# EAGLE board OLM-base_v0.9 (EAGLE 6.4)
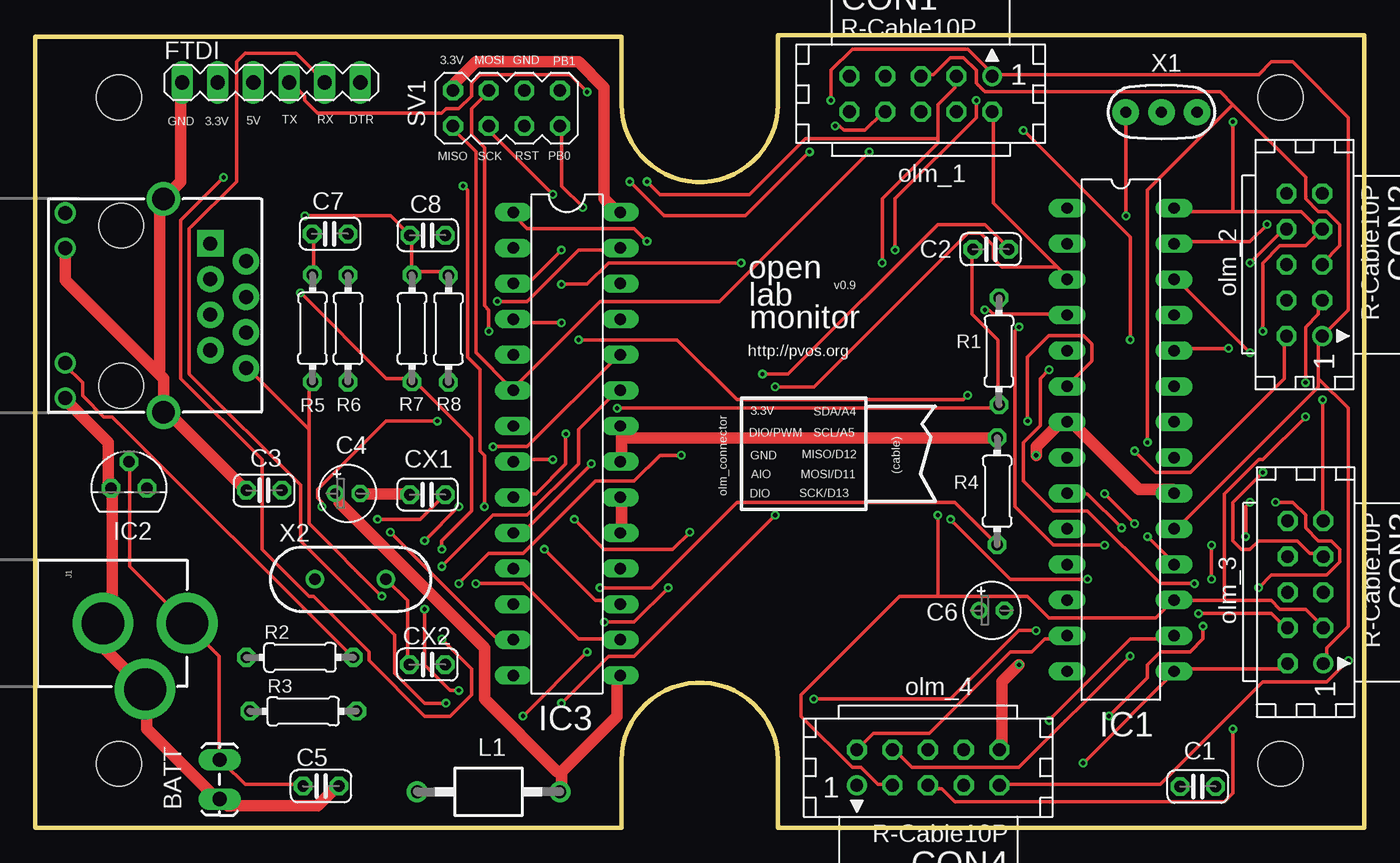
[diagram p0: board, top side]
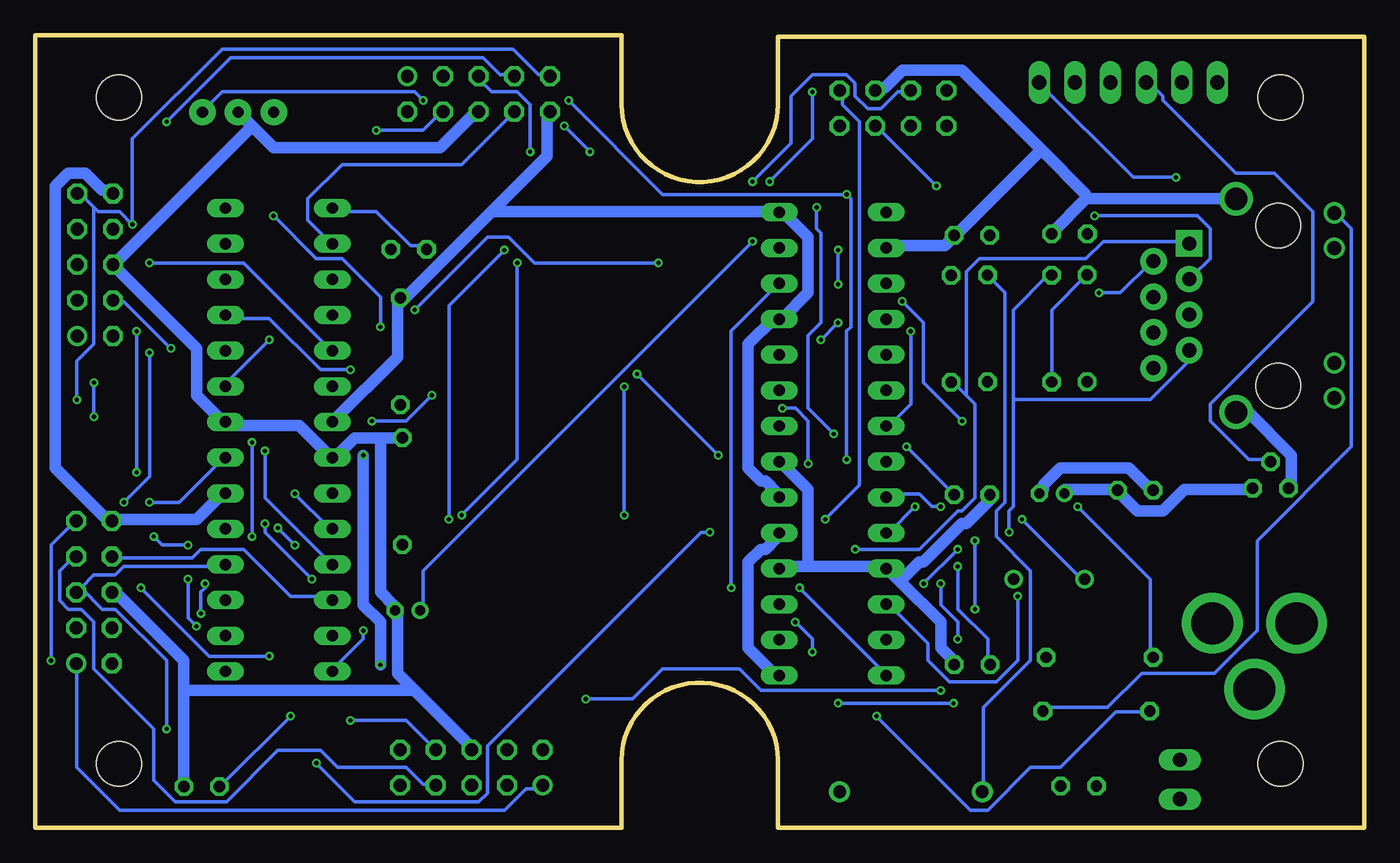
[diagram p1: board, bottom side, seen from below]

Size 94.74 x 56.52 mm. Coordinates in mm from the lower left corner, seen from the top.
Outline: 94.62,0 52.96,0 52.96,4.85
Outline: 41.78,4.9 41.78,0 0,0 0,56.39 41.78,56.39 41.78,51.51
Outline: 41.78,4.83 arc-179 52.96,4.83
Outline: 41.78,51.56 arc179 52.96,51.56 52.96,56.52 94.74,56.52 94.74,0
Copper layers (1*16): Top 0.035mm / dielectric 1.5mm / Bottom 0.035mm
Design rules "EagleRules": minimum track width 7mil, minimum drill 12mil, track to track 7mil, track to pad 7mil, pad to pad 7mil, via to via 7mil, smd to smd 0mil, copper to edge 20mil, drill to drill 10mil, minimum pad ring 10mil, minimum via ring 6mil, stop-mask expansion 2mil, vias tented up to drill 25mil, thermal gap 10mil
Net classes: 0 default: width 0.254 mm, drill 0.254 mm, clearance 0.254 mm; 1 power: width 0.813 mm, drill 0.254 mm, clearance 0.254 mm; 2 gnd: width 0.305 mm, drill 0.559 mm, clearance 0.254 mm
Holes 3.2 mm at 5.97,52.07 88.77,52.07 88.77,4.57 5.97,4.57

## Footprints (pad centres in the part's own frame; a part is rotated, then mirrored left to right if it is on the bottom)
C025-024X044 = drill 0.813 octagon: 1 -1.27,0; 2 1.27,0
E1,8-4 = drill 0.711 pad 1.168: + -0.889,0 | drill 0.711 pad 1.168 octagon: - 0.889,0
CON10L = drill 0.914: 1 5.08,1.27 | drill 0.914 octagon: 2 5.08,-1.27; 3 2.54,1.27; 4 2.54,-1.27; 5 0,1.27; 6 0,-1.27; 7 -2.54,1.27; 8 -2.54,-1.27; 9 -5.08,1.27; 10 -5.08,-1.27
MA06-1 = drill 1.016 long: 1 0,0; 2 2.54,0; 3 5.08,0; 4 7.62,0; 5 10.16,0; 6 12.7,0
DIL28-3 = drill 0.813 long: 1 -16.51,-3.81; 2 -13.97,-3.81; 3 -11.43,-3.81; 4 -8.89,-3.81; 5 -6.35,-3.81; 6 -3.81,-3.81; 7 -1.27,-3.81; 8 1.27,-3.81; 9 3.81,-3.81; 10 6.35,-3.81; 11 8.89,-3.81; 12 11.43,-3.81; 13 13.97,-3.81; 14 16.51,-3.81; 15 16.51,3.81; 16 13.97,3.81; 17 11.43,3.81; 18 8.89,3.81; 19 6.35,3.81; 20 3.81,3.81; 21 1.27,3.81; 22 -1.27,3.81; 23 -3.81,3.81; 24 -6.35,3.81; 25 -8.89,3.81; 26 -11.43,3.81; 27 -13.97,3.81; 28 -16.51,3.81
TO92 = drill 0.813 octagon: 1 -1.27,0; 2 0,1.905; 3 1.27,0
POWER_JACK_PTH = drill 2.997 pad 4.318: GND 0,7.7; GNDBREAK 4.7,10.7; PWR 0,13.7
MAGJACK = drill 1 pad 1.88 square: 1 3.175,17.445 | drill 1 pad 1.88: 2 4.445,19.985; 3 5.715,17.445; 4 6.985,19.985; 5 8.255,17.445; 6 9.525,19.985; 7 10.795,17.445; 8 12.065,19.985 | drill 1 pad 1.27: 9 1,7.1; 10 3.5,7.1; 11 11.7,7.1; 12 14.2,7.1 | drill 1.6 pad 2.184: M1 0,14.1; M2 15.2,14.1 | hole 3.2: 1.905,11.095; 13.335,11.095
1X02_LOCK_LONGPADS = drill 1.016 long: 1 -0.127,0; 2 2.667,0
BL01RN1A = drill 0.9 pad 1.5: 1 -5.08,0; 2 5.08,0
0204/7 = drill 0.813 octagon: 1 -3.81,0; 2 3.81,0
MA04-2 = drill 0.9 octagon: 1 -3.81,-1.27; 2 -3.81,1.27; 3 -1.27,-1.27; 4 -1.27,1.27; 5 1.27,-1.27; 6 1.27,1.27; 7 3.81,-1.27; 8 3.81,1.27
RESONATOR-PTH = drill 0.8 pad 1.88: 1 -2.54,0; 2 0,0; 3 2.54,0
HC49US = drill 0.813: 1 -2.54,0; 2 2.54,0

## Placement (x,y rotation side)
C1  0.1µ  [C025-024X044]  82.86,2.95 0 top
C2  0.1µ  [C025-024X044]  68.11,41.25 0 top
C3  0.1µ  [C025-024X044]  16.32,24.06 180 top
C4  10µ  [E1,8-4]  22.28,23.85 0 top
C5  0.1µ  [C025-024X044]  20.37,2.98 0 top
C6  10u  [E1,8-4]  68.19,15.5 0 top
C7  0.1µ  [C025-024X044]  21.02,42.35 180 top
C8  0.1µ  [C025-024X044]  27.98,42.24 180 top
CON1  [CON10L]  63.13,52.32 0 top
CON2  [CON10L]  90.46,40.15 270 top
CON3  [CON10L]  90.54,16.79 270 top
CON4  [CON10L]  63.64,4.3 180 top
CX1  18p  [C025-024X044]  27.97,23.75 180 top
CX2  18p  [C025-024X044]  27.96,11.64 0 top
FTDI  FTDI  [MA06-1]  10.48,53.13 0 top
IC1  ATMEGA  [DIL28-3]  77.38,27.67 270 top
IC2  MCP1702-33  [TO92]  6.69,24.2 0 top
IC3  ENC28J60SP  [DIL28-3]  37.9,27.38 270 top
J1  POWER_JACKPTH  [POWER_JACK_PTH]  -2.86,14.59 270 top
J2  MAGJACK  [MAGJACK]  -4.96,44.84 270 top
JP1  BATT  [1X02_LOCK_LONGPADS]  13.15,4.72 270 top
L1  BL01RN1A  [BL01RN1A]  32.32,2.57 0 top
R1  10k  [0204/7]  68.7,33.98 90 top
R2  1K  [0204/7]  18.88,12.15 0 top
R3  1K  [0204/7]  19.11,8.31 0 top
R4  2.32K  [0204/7]  68.57,24 90 top
R5  49.9  [0204/7]  19.78,35.61 90 top
R6  49.9  [0204/7]  22.3,35.59 90 top
R7  49.9  [0204/7]  26.87,35.6 90 top
R8  49.9  [0204/7]  29.47,35.58 270 top
SV1  SPI/ISP  [MA04-2]  33.6,51.3 0 top
X1  16 MHz  [RESONATOR-PTH]  80.27,51.02 0 top
X2  25MHz  [HC49US]  22.47,17.72 0 top

## Library data of the parts
C1-C8 CX1 CX2 R1 = resistor
CON1-CON4 = con-harting; OC_FARNELL: unknown; OC_NEWARK: unknown
FTDI IC2 SV1 = JeeLabs
IC1 = atmega8
IC3 = microchip; MF: MICROCHIP; MPN: ENC28J60/SP; OC_FARNELL: 1084619; OC_NEWARK: 96K3661
J1 = SparkFun-Connectors
J2 JP1 X1 X2 = SparkFun
L1 = inductors
R2-R8 = rcl

## Nets
A0: CON1.4 IC1.23
A1: CON2.4 IC1.24
A2: CON3.4 IC1.25
A3: CON4.4 IC1.26
D0/RX: CON1.8 FTDI.4 IC1.2
D1/TX: CON1.2 FTDI.5 IC1.3
D2: IC1.4 IC3.3
D3/PWM: CON2.8 IC1.5
D4: IC1.6 IC3.4
D5/PWM: CON2.2 IC1.11
D6/PWM: CON3.8 IC1.12
D7: CON4.2 IC1.13
D10/PWM: CON4.8 IC1.16
GND [power]: C1.2 C3.2 C4.- C5.2 C6.- C7.1 C8.1 CON1.6 CON2.6 CON3.6 CON4.6 CX1.2 CX2.2 FTDI.1 IC1.8 IC1.22 IC2.1 IC3.2 IC3.11 IC3.18 IC3.21 IC3.22 J1.GND J1.GNDBREAK J2.10 J2.12 J2.M1 J2.M2 JP1.2 R4.2 SV1.6 X1.2
LEDA: J2.11 R2.2
LEDB: J2.9 R3.2
MISO/D12: CON1.5 CON2.5 CON3.5 CON4.5 IC1.18 IC3.6 SV1.1
MOSI/D11: CON1.3 CON2.3 CON3.3 CON4.3 IC1.17 IC3.7 SV1.4
N$1: IC1.9 X1.1
N$19: C1.1 IC1.21
N$20: C2.2 FTDI.6
N$21: IC1.10 X1.3
N$37: IC3.27 R2.1
N$39: IC3.26 R3.1
N$50: C6.+ IC3.1
N$51: IC3.14 R4.1
N$52: CX1.1 IC3.24 X2.1
N$53: CX2.1 IC3.23 X2.2
N$54: C7.2 R5.2 R6.1
PB0/D8: IC1.14 IC3.9 SV1.7
PB1/D9/PWM: CON3.2 IC1.15 SV1.8
RD+: IC3.13 J2.7 R6.2
RD-: IC3.12 J2.8 R5.1
RESET: C2.1 IC1.1 IC3.10 R1.1 SV1.5
SCK/D13: CON1.1 CON2.1 CON3.1 CON4.1 IC1.19 IC3.8 SV1.3
SCL/A5: CON1.7 CON2.7 CON3.7 CON4.7 IC1.28
SDA/A4: CON1.9 CON2.9 CON3.9 CON4.9 IC1.27
TCT: C8.2 J2.3 L1.1 R7.2 R8.1
TD+: IC3.17 J2.1 R8.2
TD-: IC3.16 J2.2 R7.1
VCC [power]: C3.1 C4.+ CON1.10 CON2.10 CON3.10 CON4.10 IC1.7 IC1.20 IC2.3 IC3.15 IC3.19 IC3.20 IC3.25 IC3.28 L1.2 R1.2 SV1.2
VIN: C5.1 FTDI.3 IC2.2 J1.PWR JP1.1

## Tracks (layer width: path | path; a pad name or v marks a point on that pad's centre or on a via)
A0  (via drill 0.3)
  Top 0.254: v78.05,34.79 78.05,42.11 v70.43,49.73
  Bottom 0.254: v78.05,34.79 81.1,31.74 IC1.23 | v70.43,49.73 67.08,49.73 65.86,50.95 CON1.4
A1  (via drill 0.3)
  Top 0.254: v85.06,34.18 81.41,34.18 IC1.24
  Bottom 0.254: v85.06,34.18 88.42,37.53 89.03,37.53 CON2.4
A2  (via drill 0.3)
  Top 0.254: v72.26,32.66 71.65,32.05 71.65,28.69 70.43,27.48 70.43,24.73 72.57,22.6 75.01,22.6 80.19,17.42 v82.63,17.42 | v82.93,15.28 88.11,15.28 89.03,14.37 CON3.4
  Bottom 0.254: v72.26,32.66 74.4,32.66 78.05,36.31 81.1,36.31 IC1.25 | v82.63,17.42 82.63,17.11 82.93,16.81 v82.93,15.28
A3  (via drill 0.3)
  Top 0.254: v86.59,33.88 81.41,39.06 IC1.26 | v88.42,23.21 89.64,23.21 90.55,22.29 90.55,21.38 91.47,20.47 92.38,20.47 92.99,19.86 92.99,18.94 92.08,18.03 88.11,18.03 v87.2,17.11 | v78.05,12.24 70.13,4.31 62.51,4.31 61.29,5.53 CON4.4
  Bottom 0.254: v86.59,33.88 86.59,25.04 v88.42,23.21 | v87.2,17.11 82.32,12.24 v78.05,12.24
D0/RX  (via drill 0.3)
  Top 0.254: v39.34,52.47 38.13,53.69 31.72,53.69 31.12,53.08 31.12,52.16 30.2,51.25 29.29,51.25 28.98,50.95 20.14,50.95 19.23,51.86 19.23,52.16 18.31,53.08 FTDI.4 | v42.39,46.07 44.83,43.63 50.62,43.63 v55.19,48.2 | v57.02,50.03 57.33,50.03 57.63,49.73 59.16,49.73 60.38,50.95 CON1.8
  Bottom 0.254: IC1.2 73.79,41.8 75.31,43.33 75.31,44.85 72.87,47.29 64.34,47.29 60.68,50.95 CON1.8 | v39.34,52.47 39.34,49.12 v42.39,46.07 | v57.02,50.03 v55.19,48.2
D1/TX  (via drill 0.3)
  Top 0.254: 72.87,39.97 68.3,44.54 68.3,50.95 CON1.2 | 72.87,39.97 73.48,39.36 IC1.3 | v29.29,8.88 27.76,8.88 25.63,11.02 25.63,13.76 18.92,20.47 18.92,24.43 11,32.35 11,42.72 14.35,46.07 14.35,54.6 14.96,55.21 18.62,55.21 20.45,53.38 FTDI.5 | v37.52,8.88 40.87,12.24 42.7,12.24 v52.76,22.29 | v52.76,31.44 55.5,31.44 66.47,42.41 67.39,42.41 68.3,41.5 68.3,40.58 68.91,39.97 72.87,39.97
  Bottom 0.254: v37.52,8.88 v29.29,8.88 | v52.76,31.44 v52.76,22.29
D2  (via drill 0.3)
  Top 0.254: v37.52,41.19 35.38,39.06 34.16,39.06 IC3.3 | v37.52,38.75 39.34,38.75 40.87,40.28 v50.32,40.28 | v67.69,36.92 68,36.92 68.3,36.62 73.48,36.62 IC1.4
  Bottom 0.254: v37.52,38.75 v37.52,41.19 | v50.32,40.28 59.16,40.28 60.99,42.11 62.51,42.11 v67.69,36.92
D3/PWM  (via drill 0.3)
  Top 0.254: v86.59,40.28 89.03,42.72 CON2.8
  Bottom 0.254: v86.59,40.28 79.88,40.28 73.79,34.18 IC1.5
D4  (via drill 0.3)
  Top 0.254: v37.52,36.01 34.16,36.01 IC3.4 | v38.74,34.79 45.75,34.79 50.01,30.52 66.17,30.52 v66.47,30.83 | v70.74,29 70.74,33.57 72.26,35.1 74.7,35.1 75.31,34.49 75.31,33.27 73.79,31.74 IC1.6
  Bottom 0.254: v38.74,34.79 v37.52,36.01 | v66.47,30.83 68.3,29 v70.74,29
D5/PWM  (via drill 0.3)
  Top 0.254: v78.36,26.87 79.88,25.34 82.32,25.34 89.03,32.05 89.03,34.79 CON2.2
  Bottom 0.254: v78.36,26.87 78.36,23.51 73.79,18.94 IC1.11
D6/PWM
  Bottom 0.254: IC1.12 73.79,16.5 76.53,16.5 79.88,19.86 82.93,19.86 83.54,19.25 89.03,19.25 CON3.8
D7
  Top 0.254: IC1.13 73.48,13.45 71.96,13.45 71.04,12.54 69.52,12.54 63.73,6.75 59.77,6.75 58.85,5.83 CON4.2
D10/PWM  (via drill 0.3)
  Top 0.254: v72.26,7.66 78.05,13.45 81.1,13.45 IC1.16
  Bottom 0.254: v72.26,7.66 68.3,7.66 66.47,5.83 CON4.8
GND
  Top 0.813: J2.12 2.16,30.52 5.21,27.48 5.21,24.43 IC2.1 5.51,23.82 5.51,15.28 4.9,14.67 J1.GND 4.9,14.37 4.9,12.85 7.65,10.1 J1.GNDBREAK 7.95,9.8 7.95,7.05 12.83,2.18 JP1.2 13.44,1.87 13.74,1.57 20.14,1.57 21.36,2.79 C5.2 | FTDI.1 10.39,53.08 10.39,46.07 9.17,44.85 J2.M1 8.86,44.54 8.86,32.66 8.71,32.5 | 41.78,27.78 41.78,28.39 IC3.22 | 41.78,27.78 41.78,26.26 IC3.21 | C4.- 23.19,23.82 26.54,23.82 CX1.2 | C3.2 14.96,24.12 9.17,29.91 J2.M2 9.17,30.22 9.17,32.05 8.71,32.5 | 8.71,32.5 2.16,39.06 2.16,41.19 J2.10 | 41.78,27.78 68.3,27.78 R4.2
  Bottom 0.813: 79.27,50.03 80.19,50.95 X1.2 | 79.27,50.03 77.75,48.51 65.86,48.51 63.42,50.95 CON1.6 | 79.27,50.03 89.03,40.28 CON2.6 89.03,39.97 83.24,34.18 83.24,30.83 81.41,29 IC1.22 81.1,28.69 75.92,28.69 73.79,26.56 IC1.8 73.48,26.26 71.96,27.78 70.13,27.78 | 84.15,9.8 84.15,11.93 89.03,16.81 CON3.6 | 84.15,9.8 84.15,3.09 C1.2 | 70.13,27.78 68.61,27.78 R4.2 | 67.84,9.95 63.73,5.83 CON4.6 | 67.84,9.95 68.91,11.02 68.91,15.28 C6.- 69.22,15.89 70.13,16.81 70.13,27.78 | 84.15,9.8 68,9.8 67.84,9.95 | IC3.2 33.86,41.5 29.9,41.5 29.29,42.11 C8.1 28.98,42.41 23.04,48.35 | 19.84,44.85 22.28,42.41 C7.1 | 19.84,44.85 9.17,44.85 J2.M1 | 23.04,48.35 19.84,45.15 19.84,44.85 | 23.04,48.35 28.68,53.99 32.94,53.99 34.16,52.77 34.77,52.77 SV1.6 | 33.1,17.57 33.86,18.33 IC3.11 34.47,18.64 39.65,18.64 | 33.1,17.57 30.2,14.67 30.2,12.85 29.29,11.93 CX2.2 | 39.65,18.64 41.48,18.64 IC3.18 | 39.65,18.64 39.65,24.12 41.48,25.95 IC3.21 | C4.- 22.89,24.12 22.89,24.43 21.67,25.65 16.79,25.65 15.27,24.12 C3.2 | 33.1,17.57 31.72,18.94 31.42,18.94 28.68,21.68 28.37,21.68 26.54,23.51 CX1.2 | IC2.1 5.21,24.43 5.21,26.56 8.26,29.61 8.86,29.61 J2.M2
LEDA
  Top 0.254: R2.2 22.58,12.24 5.51,29.3 4.9,29.3 3.38,30.83 3.38,31.74 2.16,32.96 J2.11
LEDB
  Bottom 0.254: R3.2 22.89,8.58 18.31,8.58 15.88,11.02 10.69,11.02 7.65,14.06 7.65,20.47 0.94,27.17 0.94,42.72 1.85,43.63 J2.9
MISO/D12  (via drill 0.3)
  Top 0.254: v85.37,7.05 85.37,2.48 84.76,1.87 65.56,1.87 64.64,2.79 63.73,2.79 CON4.5 | SV1.1 29.59,50.03 31.42,48.2 31.42,33.88 33.86,31.44 IC3.6 34.16,31.44 40.26,37.53 48.79,37.53 v59.46,48.2 | 85.37,51.55 90.55,46.37 90.55,44.85 91.47,43.93 92.08,43.93 92.99,43.02 92.99,41.5 91.77,40.28 CON2.5 | 85.37,51.55 84.46,52.47 67.69,52.47 67.08,53.08 67.08,53.99 66.17,54.91 65.25,54.91 64.03,53.69 63.42,53.69 CON1.5 | v79.27,20.77 81.1,18.94 IC1.18 | v79.27,27.48 79.27,45.46 85.37,51.55
  Bottom 0.254: 91.47,17.11 91.77,16.81 CON3.5 91.47,17.11 | 91.47,17.11 90.55,18.03 89.03,18.03 88.42,18.64 81.41,18.64 IC1.18 | v85.37,7.05 85.37,11.93 89.03,15.59 89.94,15.59 91.47,17.11 | v59.46,48.2 59.46,51.55 60.38,52.47 62.2,52.47 63.12,53.38 CON1.5 | v79.27,27.48 v79.27,20.77
MOSI/D11  (via drill 0.3)
  Top 0.254: v32.33,35.4 32.33,36.92 32.03,37.23 32.03,48.51 31.12,49.42 31.12,51.25 32.33,52.47 SV1.4 | 84.76,16.2 88.11,16.2 88.72,15.59 90.55,15.59 91.77,14.37 CON3.3 | 84.76,16.2 81.41,16.2 IC1.17 81.1,16.2 79.88,14.98 72.26,14.98 70.74,16.5 64.34,16.5 | 64.34,16.5 61.6,16.5 54.58,9.49 54.58,7.97 58.24,4.31 58.85,4.31 60.07,3.09 60.99,3.09 CON4.3 | v90.55,31.74 90.55,35.71 91.47,36.62 91.47,37.53 CON2.3 | v90.55,29.3 87.5,26.26 87.2,26.26 84.76,23.82 84.76,16.2 | 64.34,49.12 64.34,48.81 60.38,44.85 v60.38,40.28 | 64.34,49.12 64.34,51.55 65.56,52.77 65.56,53.38 CON1.3 | 64.34,16.5 v64.34,22.29 | v43.61,46.07 44.53,45.15 50.93,45.15 54.89,49.12 64.34,49.12
  Bottom 0.254: v32.33,35.4 32.33,30.22 33.86,28.69 IC3.7 | v90.55,29.3 v90.55,31.74 | v60.38,40.28 60.38,26.26 v64.34,22.29 | v43.61,46.07 40.87,48.81 40.87,52.16 39.34,53.69 36.91,53.69 36.3,53.08 36.3,52.16 35.38,51.25 34.47,51.25 33.25,52.47 32.33,52.47 SV1.4
N$1  (via drill 0.3)
  Top 0.254: v77.44,21.38 75.01,23.82 73.79,23.82 IC1.9 | v76.23,20.16 72.57,20.16 69.82,22.9 69.82,35.4 v70.13,35.71 | v77.75,43.63 77.75,50.95 X1.1
  Bottom 0.254: v76.23,20.16 v77.44,21.38 | v70.13,35.71 70.13,37.84 72.87,40.58 74.7,40.58 v77.75,43.63
N$19  (via drill 0.3)
  Top 0.254: v76.53,7.97 79.27,10.71 79.27,11.63 80.19,12.54 82.32,12.54 83.24,13.45 v83.24,14.37 | v83.85,20.16 v83.85,17.72 | v86.28,20.77 86.28,22.9 v86.59,23.21
  Bottom 0.254: v76.53,7.97 81.41,3.09 C1.1 | v83.24,14.37 83.85,14.98 v83.85,17.72 | v83.85,20.16 85.67,20.16 v86.28,20.77 | v86.59,23.21 84.46,23.21 81.41,26.26 IC1.21
N$20  (via drill 0.3)
  Top 0.254: v51.84,32.35 53.67,32.35 64.34,43.02 67.69,43.02 69.22,41.5 C2.2 | v46.05,26.56 44.53,26.56 42.7,24.73 39.95,24.73 34.77,19.55 32.33,19.55 v30.2,17.42 | v28.98,13.45 31.12,11.32 31.12,9.49 29.59,7.97 27.76,7.97 23.8,11.93 23.8,12.54 19.84,16.5 19.53,16.5 16.18,19.86 16.18,26.26 10.39,32.05 10.39,43.33 v13.44,46.37
  Bottom 0.254: v46.05,26.56 v51.84,32.35 | v30.2,17.42 30.2,15.89 28.98,14.67 v28.98,13.45 | v13.44,46.37 16.48,46.37 23.19,53.08 FTDI.6
N$21  (via drill 0.3)
  Top 0.254: v78.36,21.68 v76.23,23.82 | v75.01,17.72 69.52,17.72 v65.25,21.99 | v61.29,41.19 61.29,44.85 67.08,50.64 v67.08,51.86
  Bottom 0.254: v76.23,23.82 73.79,21.38 IC1.10 | v78.36,21.68 78.36,21.07 v75.01,17.72 | v65.25,21.99 65.25,37.23 v61.29,41.19 | v67.08,51.86 67.69,52.47 81.41,52.47 82.63,51.25 X1.3
N$37  (via drill 0.3)
  Top 0.254: v20.45,22.9 20.45,23.21 20.14,23.51 20.14,24.12 25.02,29 v28.68,29 | v32.94,37.53 35.08,37.53 38.74,41.19 41.48,41.19 IC3.27
  Bottom 0.254: v20.45,22.9 15.27,17.72 15.27,12.24 R2.1 | v28.68,29 31.42,31.74 31.42,36.01 v32.94,37.53
N$39  (via drill 0.3)
  Top 0.254: v39.34,12.54 v34.77,7.97 | v40.56,14.67 42.7,14.67 v45.14,17.11
  Bottom 0.254: v34.77,7.97 28.07,1.26 26.85,1.26 23.8,4.31 21.67,4.31 17.7,8.27 15.57,8.27 R3.1 | v39.34,12.54 39.34,13.45 v40.56,14.67 | v45.14,17.11 45.14,35.4 41.78,38.75 IC3.26
N$50  (via drill 0.3)
  Top 0.254: v43.61,41.8 42.7,42.72 35.08,42.72 34.16,43.63 IC3.1
  Bottom 0.254: v43.61,41.8 67.08,18.33 67.08,15.59 C6.+
N$51  (via drill 0.3)
  Top 0.254: v40.26,17.11 43.92,17.11 50.01,23.21 65.56,23.21 68.3,20.47 R4.1
  Bottom 0.254: v40.26,17.11 34.16,11.02 IC3.14
N$52  (via drill 0.3)
  Top 0.254: v24.41,21.99 27.46,21.99 28.98,23.51 CX1.1 | v32.64,27.17 35.08,27.17 41.48,33.57 IC3.24
  Bottom 0.254: v24.41,21.99 20.14,17.72 X2.1 | v32.64,27.17 29.29,23.82 CX1.1
N$53  (via drill 0.3)
  Top 0.254: CX2.1 26.54,11.93 26.54,16.2 X2.2 | v28.98,18.64 32.64,22.29 35.08,22.29 38.74,25.95 38.74,28.39 41.48,31.13 IC3.23
  Bottom 0.254: v28.98,18.64 28.98,15.59 26.85,13.45 26.85,11.93 CX2.1
N$54
  Top 0.254: C7.2 19.84,42.11 19.84,39.67 R5.2
  Bottom 0.254: R6.1 22.28,32.05 22.28,36.92 19.84,39.36 R5.2
PB0/D8  (via drill 0.3)
  Top 0.254: v71.35,14.06 70.13,14.06 65.25,9.19 v55.5,9.19 | v30.2,9.8 29.59,9.8 27.76,11.63 v27.76,15.59 | v30.2,22.9 v27.76,20.47 | v39.04,44.24 37.52,45.76 37.52,50.03 SV1.7 | v37.82,28.09 37.82,25.95 35.69,23.82 34.16,23.82 IC3.9
  Bottom 0.254: v71.35,14.06 71.35,13.45 73.48,11.32 IC1.14 | v55.5,9.19 52.15,9.19 50.01,11.32 44.53,11.32 43,9.8 v30.2,9.8 | v27.76,20.47 v27.76,15.59 | v30.2,22.9 30.81,22.9 31.72,23.82 33.86,23.82 IC3.9 | v39.04,44.24 39.04,42.72 38.74,42.41 38.74,36.01 39.65,35.1 39.65,29.91 v37.82,28.09
PB1/D9/PWM  (via drill 0.3)
  Top 0.254: CON3.2 89.03,11.63 88.72,11.32 81.41,11.32 IC1.15 81.1,11.02 v74.7,4.62 | v38.43,21.99 40.56,19.86 45.44,19.86 v46.66,21.07
  Bottom 0.254: v38.43,21.99 35.99,24.43 35.99,50.34 37.21,51.55 37.21,52.47 SV1.8 | v46.66,21.07 47.27,21.07 62.51,5.83 62.51,2.48 63.12,1.87 71.96,1.87 v74.7,4.62
RD+  (via drill 0.3)
  Top 0.254: v25.32,21.07 32.94,13.45 33.86,13.45 IC3.13
  Bottom 0.254: v25.32,21.07 25.32,22.6 25.02,22.9 25.02,30.52 | 25.02,30.52 25.02,36.92 22.58,39.36 R6.2 | 25.02,30.52 15.27,30.52 12.52,33.27 12.52,33.88 J2.7
RD-  (via drill 0.3)
  Top 0.254: v24.71,16.5 19.53,21.68 19.53,28.39 | 19.53,28.39 19.53,31.74 R5.1 | 19.53,28.39 15.27,32.66 J2.8
  Bottom 0.254: v24.71,16.5 24.71,11.93 26.24,10.41 29.59,10.41 31.12,11.93 31.12,13.15 33.86,15.89 IC3.12
RESET  (via drill 0.3)
  Top 0.254: C2.1 66.78,41.19 66.78,36.62 68.61,34.79 68.61,30.22 R1.1 68.61,29.91 v41.48,29.91 | v32.03,22.9 32.03,26.56 31.72,26.87 31.72,32.66 30.81,33.57 30.81,45.46 v30.51,45.76 | v39.65,25.95 34.77,21.07 34.16,21.07 IC3.10
  Bottom 0.254: C2.1 67.08,41.5 68,41.5 70.43,43.93 73.48,43.93 IC1.1 | v32.03,22.9 33.86,21.07 IC3.10 | v30.51,45.76 34.77,50.03 SV1.5 | v41.48,29.91 40.56,29.91 39.65,29 v39.65,25.95
SCK/D13  (via drill 0.3)
  Top 0.254: v36.91,26.26 34.16,26.26 IC3.8 | v36.91,45.15 32.03,50.03 SV1.3 | 91.47,32.05 91.47,34.79 CON2.1 91.77,35.1 93.6,36.92 93.6,50.64 89.64,54.6 88.11,54.6 87.2,53.69 68.3,53.69 | 91.47,32.05 91.47,31.44 81.41,21.38 IC1.19 | v56.72,51.86 56.72,53.99 58.24,55.52 66.47,55.52 68.3,53.69 | 68.3,53.69 CON1.1 | 91.47,32.05 93.6,29.91 93.6,14.37 92.08,12.85 92.08,11.93 CON3.1
  Bottom 0.254: CON4.1 58.85,2.79 59.77,2.79 61.29,1.26 88.72,1.26 91.77,4.31 91.77,11.63 CON3.1 | v36.91,26.26 36.91,35.4 36.6,35.71 36.6,44.85 v36.91,45.15 50.01,45.15 v56.72,51.86
SCL/A5  (via drill 0.3)
  Top 0.254: 85.37,43.93 90.25,43.93 91.47,42.72 CON2.7 91.47,42.41 90.55,41.5 88.72,41.5 87.5,40.28 v87.5,35.4 | 85.37,43.93 81.41,43.93 IC1.28 | 85.37,43.93 v85.37,50.34 | v87.5,25.34 85.37,23.21 85.37,20.47 85.98,19.86 86.59,19.86 87.2,20.47 89.94,20.47 90.86,19.55 91.77,19.55 CON3.7
  Bottom 0.254: CON4.7 66.47,3.09 67.08,3.09 68.3,4.31 73.18,4.31 74.4,5.53 77.44,5.53 81.1,1.87 84.76,1.87 86.28,3.4 86.28,7.05 90.55,11.32 90.55,14.67 91.47,15.59 92.38,15.59 92.99,16.2 92.99,18.33 92.08,19.25 CON3.7 | v85.37,50.34 80.8,54.91 62.81,54.91 61.6,53.69 60.68,53.69 CON1.7 | v87.5,35.4 v87.5,25.34
SDA/A4  (via drill 0.3)
  Top 0.254: v93.6,11.93 92.08,10.41 87.5,10.41 80.19,3.09 68.91,3.09 CON4.9 | v87.81,43.02 86.59,41.8 81.41,41.8 IC1.27 | v91.77,30.52 91.77,21.99 CON3.9
  Bottom 0.254: v93.6,11.93 93.6,20.16 92.08,21.68 CON3.9 | 90.55,44.24 91.47,45.15 CON2.9 | 90.55,44.24 90.25,43.93 88.72,43.93 v87.81,43.02 87.81,49.12 81.41,55.52 60.68,55.52 58.85,53.69 58.24,53.69 CON1.9 | v91.77,30.52 91.77,33.27 90.55,34.49 90.55,44.24
TCT  (via drill 0.3)
  Top 0.254: R8.1 29.29,39.67 27.15,39.67 R7.2 26.85,39.67 26.85,42.11 C8.2 26.54,42.41 25.32,43.63 v19.23,43.63
  Bottom 0.254: L1.1 27.15,2.79 27.15,8.58 23.8,11.93 23.8,18.33 26.24,20.77 26.24,22.6 25.63,23.21 25.63,38.14 26.85,39.36 R7.2 | v19.23,43.63 11.91,43.63 11,42.72 11,40.58 12.22,39.36 J2.3
TD+  (via drill 0.3)
  Top 0.254: v36.3,19.86 39.95,16.2 41.48,16.2 IC3.17
  Bottom 0.254: v36.3,19.86 31.72,19.86 28.98,22.6 28.68,22.6 27.76,23.51 27.76,30.22 28.37,30.83 | 28.37,30.83 29.29,31.74 R8.2 | 28.37,30.83 28.37,39.67 27.46,40.58 19.84,40.58 18.62,41.8 12.52,41.8 J2.1
TD-  (via drill 0.3)
  Top 0.254: v18.92,38.14 25.02,32.05 26.85,32.05 R7.1 27.15,31.74 31.12,27.78 31.12,22.6 28.98,20.47 v28.98,19.86 | v31.42,17.42 34.77,17.42 38.74,13.45 41.48,13.45 IC3.16
  Bottom 0.254: v18.92,38.14 17.4,38.14 15.27,40.28 J2.2 | v28.98,19.86 v31.42,17.42
VCC  (via drill 0.3)
  Top 0.813: IC3.19 41.78,21.07 41.78,23.51 IC3.20 | 37.52,4.01 41.48,7.97 41.48,10.71 IC3.15 | 37.52,4.01 37.52,2.79 L1.2 | C4.+ 21.67,23.82 21.67,23.21 32.03,12.85 32.03,9.19 37.21,4.01 37.52,4.01 | SV1.2 29.9,52.77 29.9,53.08 31.42,54.6 38.74,54.6 40.56,52.77 40.56,44.85 41.48,43.93 IC3.28 | IC1.20 81.1,24.12 78.66,24.12 73.79,29 IC1.7 73.18,29 71.35,27.17 v71.35,26.56 | v70.13,11.63 68.91,10.41 68.91,5.83 CON4.10
  Bottom 0.813: C4.+ 21.36,24.12 17.7,24.12 C3.1 17.4,23.82 16.18,22.6 14.35,22.6 12.83,24.12 8.26,24.12 IC2.3 | IC3.19 41.78,20.77 42.7,19.86 43,19.86 43.92,18.94 43.92,12.85 41.78,10.71 IC3.15 | IC1.7 73.48,29 68.91,33.57 68.91,37.53 R1.2 68.3,37.84 62.05,44.09 | v70.13,11.63 70.13,14.67 71.35,15.89 v71.35,26.56 | 62.05,44.09 58.24,47.9 58.24,50.95 CON1.10 | IC1.20 81.41,23.82 83.24,21.99 89.03,21.99 CON3.10 89.64,21.99 93.29,25.65 93.29,45.76 92.38,46.68 91.16,46.68 89.94,45.46 89.33,45.46 CON2.10 | 62.05,44.09 61.9,43.93 42.09,43.93 IC3.28 41.48,43.93 39.65,42.11 39.65,38.14 41.48,36.31 IC3.25 42.09,36.31 43.92,34.49 43.92,25.65 43,24.73 42.7,24.73 41.78,23.82 IC3.20
VIN
  Top 0.254: C5.1 18.92,3.09 14.96,3.09 13.44,4.62 JP1.1 13.13,4.92 13.13,12.24 11,14.37 J1.PWR 10.69,14.67 6.73,18.64 6.73,25.95 IC2.2
  Bottom 0.254: FTDI.3 15.27,53.08 14.35,52.16 14.35,51.86 9.17,46.68 6.43,46.68 3.68,43.93 3.68,37.53 11,30.22 11,29 8.26,26.26 6.73,26.26 IC2.2

## Text on the board
tPlace: 3.3V | MOSI | GND | PB1 | X1 | GND | 3.3V | 5V | TX | RX | DTR | MISO | SCK | RST | PB0 | olm_1 | open | v0.9 | olm_2 | lab | monitor | http://pvos.org | 3.3V | SDA/A4 | DIO/PWM | SCL/A5 | GND | MISO/D12 | AIO | MOSI/D11 | (cable) | olm_connector | DIO | SCK/D13 | olm_3 | olm_4 | BATT